# Altium PCB PCB1.PcbDoc
Units mm, origin at the board's own origin, x right, y up, seen from the top; angles counter-clockwise.
Board outline 170 x 40 mm, 2 copper layers (Top Layer, Bottom Layer); 55 components, 44 nets, 202 pads, 0 vias.
Unrouted connection lines stored in the file: 122.
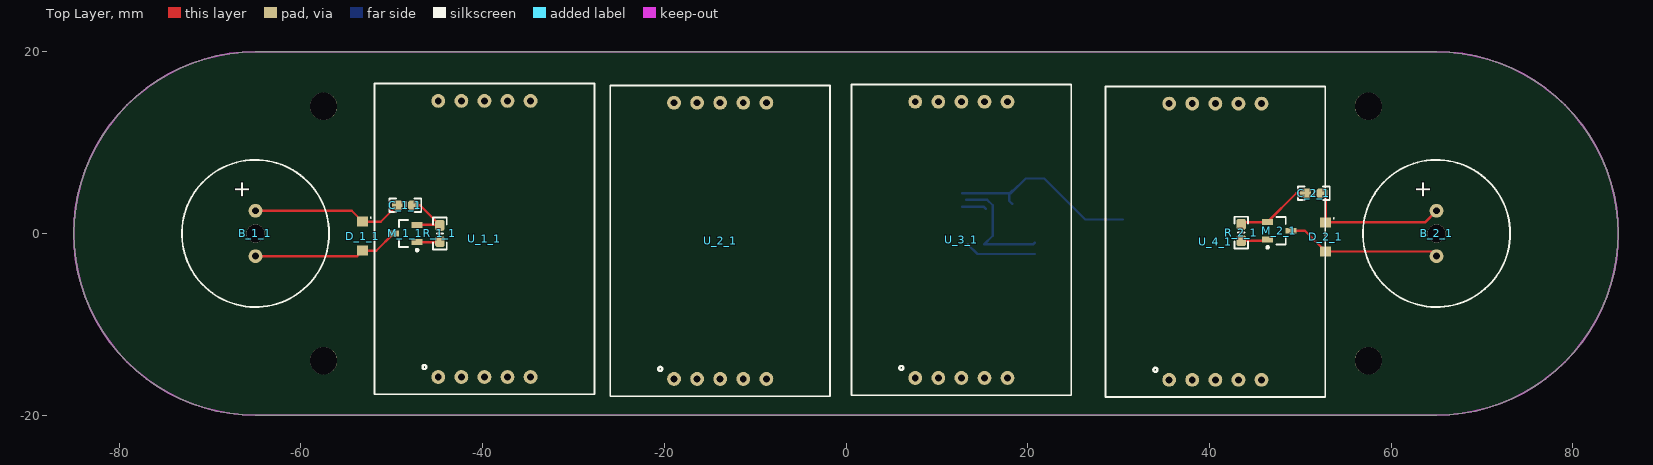
[diagram p0: Top Layer view]
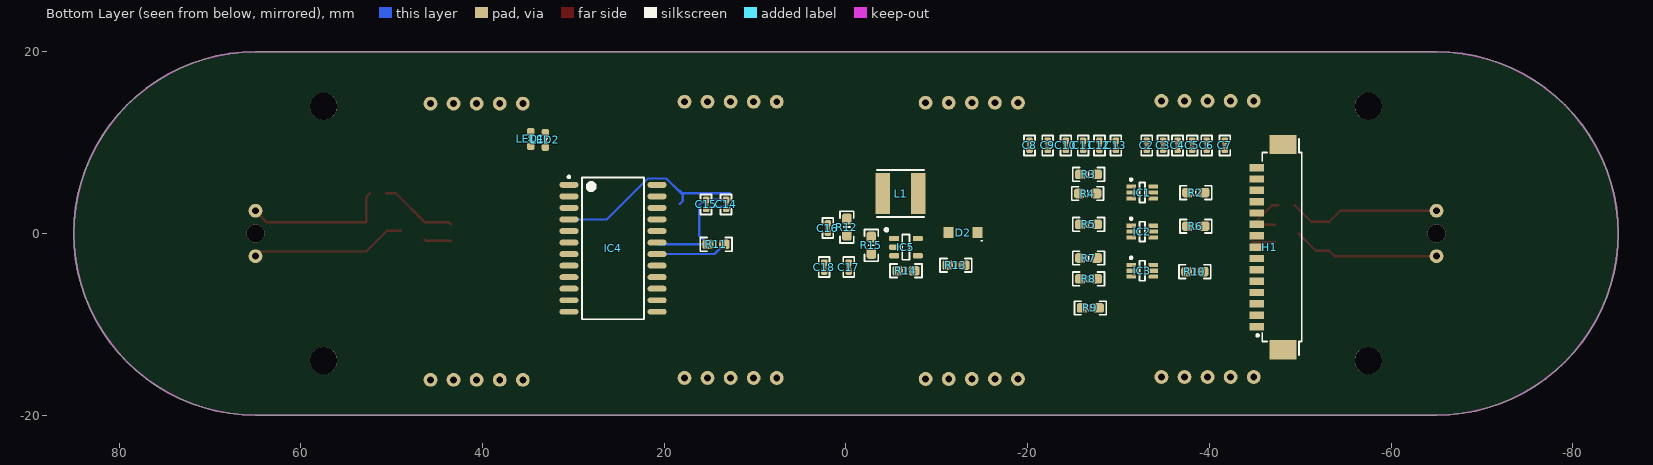
[diagram p1: Bottom Layer view, seen from below]

## Layer stack, top to bottom
Top Solder: solder mask 0.0102, Solder Resist, Dk 3.5
Top Layer: signal copper 0.0356
Dielectric 1: dielectric 0.32, FR-4, Dk 4.8
Bottom Layer: signal copper 0.0356
Bottom Solder: solder mask 0.0102, Solder Resist, Dk 3.5

## Board outline
-65,-20 65,-20 66.427,-19.949 67.846,-19.796 69.251,-19.543 70.635,-19.19 71.989,-18.739 73.308,-18.193 74.585,-17.554 75.813,-16.825 76.986,-16.011 78.097,-15.115 79.142,-14.142 80.115,-13.097 81.011,-11.986 81.825,-10.813 82.554,-9.585 83.193,-8.308 83.739,-6.989 84.19,-5.635 84.543,-4.251 84.796,-2.846 84.949,-1.427 85,0 84.949,1.427 84.796,2.846 84.543,4.251 84.19,5.635 83.739,6.989 83.193,8.308 82.554,9.585 81.825,10.813 81.011,11.986 80.115,13.097 79.142,14.142 78.097,15.115 76.986,16.011 75.813,16.825 74.585,17.554 73.308,18.193 71.989,18.739 70.635,19.19 69.251,19.543 67.846,19.796 66.427,19.949 65,20 -65,20 -66.427,19.949 -67.846,19.796 -69.251,19.543 -70.635,19.19 -71.989,18.739 -73.308,18.193 -74.585,17.554 -75.813,16.825 -76.986,16.011 -78.097,15.115 -79.142,14.142 -80.115,13.097 -81.011,11.986 -81.825,10.813 -82.554,9.585 -83.193,8.308 -83.739,6.989 -84.19,5.635 -84.543,4.251 -84.796,2.846 -84.949,1.427 -85,0 -84.949,-1.427 -84.796,-2.846 -84.543,-4.251 -84.19,-5.635 -83.739,-6.989 -83.193,-8.308 -82.554,-9.585 -81.825,-10.813 -81.011,-11.986 -80.115,-13.097 -79.142,-14.142 -78.097,-15.115 -76.986,-16.011 -75.813,-16.825 -74.585,-17.554 -73.308,-18.193 -71.989,-18.739 -70.635,-19.19 -69.251,-19.543 -67.846,-19.796 -66.427,-19.949

## Design rules (kind name [scope] priority, off if disabled: settings)
Clearance [All] p1: gap=0.254
PolygonConnect [All] p1: connectstyle=Relief reliefconductorwidth=0.254 reliefentries=4 polygonreliefangle="90 Angle" airgapwidth=0.254
RoomDefinition TP_IHM_MAIN [InComponentClass('TP_IHM_MAIN')] p1: confinementstyle=ConfineIn formatcopy=TRUE lockcomponents=FALSE outline 36.4,8 31.5,8 31.5,12.8 36.4,12.8
RoomDefinition U_TP_IHM_CONNECTOR [InComponentClass('U_TP_IHM_CONNECTOR')] p2: confinementstyle=ConfineIn formatcopy=TRUE lockcomponents=FALSE outline -18.8,-14.2 -50.8,-14.2 -50.8,11.2 -18.8,11.2
RoomDefinition U_TP_IHM_DRIVERS [InComponentClass('U_TP_IHM_DRIVERS')] p3: confinementstyle=ConfineIn formatcopy=TRUE lockcomponents=FALSE outline 32.3,-11.2 11.8,-11.2 11.8,7.2 32.3,7.2
RoomDefinition U_TP_IHM_POWER [InComponentClass('U_TP_IHM_POWER')] p4: confinementstyle=ConfineIn formatcopy=TRUE lockcomponents=FALSE outline 4.4,-7.9 -16.4,-7.9 -16.4,8.5 4.4,8.5
RoomDefinition U_TP_IHM_7SEG3 [InComponentClass('U_TP_IHM_7SEG3')] p5: confinementstyle=ConfineIn formatcopy=TRUE lockcomponents=FALSE outline 5.7,-8.7 31.274,-8.7 31.274,16.7 5.7,16.7
RoomDefinition U_TP_IHM_BUZZER2 [InComponentClass('U_TP_IHM_BUZZER2')] p6: confinementstyle=ConfineIn formatcopy=TRUE lockcomponents=FALSE outline 74.36,10.52 42.2,10.52 42.2,-9.7 74.36,-9.7
RoomDefinition U_TP_IHM_BUZZER1 [InComponentClass('U_TP_IHM_BUZZER1')] p7: confinementstyle=ConfineIn formatcopy=TRUE lockcomponents=FALSE outline -74.5,-10.8 -42.9,-10.8 -42.9,10.9 -74.5,10.9
RoomDefinition U_TP_IHM_7SEG4 [InComponentClass('U_TP_IHM_7SEG4')] p8: confinementstyle=ConfineIn formatcopy=TRUE lockcomponents=FALSE outline 28.2,-8.6 53.2,-8.6 53.2,16.8 28.2,16.8
RoomDefinition U_TP_IHM_7SEG2 [InComponentClass('U_TP_IHM_7SEG2')] p9: confinementstyle=ConfineIn formatcopy=TRUE lockcomponents=FALSE outline -26.3,-7.3 -1.2,-7.3 -1.2,16.9 -26.3,16.9
RoomDefinition U_TP_IHM_7SEG1 [InComponentClass('U_TP_IHM_7SEG1')] p10: confinementstyle=ConfineIn formatcopy=TRUE lockcomponents=FALSE outline -52.734,-8.6 -27.8,-8.6 -27.8,16.8 -52.734,16.8
RoutingVias [All] p1: holewidth=0.711 width=1.27 viastyle="Through Hole" minholewidth=0.711 minwidth=1.27 maxholewidth=0.711 maxwidth=1.27
SolderMaskExpansion [All] p1: expansion=0.102
Width [All] p1: maxlimit=0.254 minlimit=0.254 preferedwidth=0.254
29 further rules are at their usual default settings.

## Classes and differential pairs
component class TP_IHM_MAIN: LED1 LED2
component class U_TP_IHM_7SEG1: U_1_1
component class U_TP_IHM_7SEG2: U_2_1
component class U_TP_IHM_7SEG3: U_3_1
component class U_TP_IHM_7SEG4: U_4_1
component class U_TP_IHM_BUZZER1: B_1_1 C_1_1 D_1_1 M_1_1 R_1_1
component class U_TP_IHM_BUZZER2: B_2_1 C_2_1 D_2_1 M_2_1 R_2_1
component class U_TP_IHM_CONNECTOR: C2 C3 C4 C5 C6 C7 C8 C9 C10 C11 C12 C13 H1 IC1 IC2 IC3 R2 R3 R4 R5 R6 R7 R8 R9 R10
component class U_TP_IHM_DRIVERS: C14 C15 IC4 R11
component class U_TP_IHM_POWER: C16 C17 C18 D2 IC5 L1 R12 R13 R14 R15
channel class TP_IHM_7SEG: U_TP_IHM_7SEG1 U_TP_IHM_7SEG2 U_TP_IHM_7SEG3 U_TP_IHM_7SEG4
channel class TP_IHM_BUZZER: U_TP_IHM_BUZZER1 U_TP_IHM_BUZZER2

## Components (designator, comment, footprint, x,y, rotation, side; value= is the part's Value field where it differs from the comment)
B_1_1 "Buzzer" SD160709 -65,0 r90 top (schematic designator B1)
B_2_1 "Buzzer" SD160709 65,0 r90 top (schematic designator B1)
C2 "CerCap" 0402_CAP_LD -33.1,9.7 r270 bottom
C3 "CerCap" 0402_CAP_LD -34.9,9.7 r90 bottom
C4 "CerCap" 0402_CAP_LD -36.5,9.7 r90 bottom
C5 "CerCap" 0402_CAP_LD -38.1,9.7 r90 bottom
C6 "CerCap" 0402_CAP_LD -39.7,9.7 r90 bottom
C7 "CerCap" 0402_CAP_LD -41.7,9.7 r90 bottom
C8 "CerCap" 0402_CAP_LD -20.2,9.7 r90 bottom
C9 "CerCap" 0402_CAP_LD -22.2,9.7 r90 bottom
C10 "CerCap" 0402_CAP_LD -24.2,9.7 r90 bottom
C11 "CerCap" 0402_CAP_LD -26.1,9.7 r90 bottom
C12 "CerCap" 0402_CAP_LD -27.9,9.7 r90 bottom
C13 "CerCap" 0402_CAP_LD -29.7,9.7 r90 bottom
C14 "CerCap" 0402_CAP_LD 13.2,3.2 r90 bottom
C15 "CerCap" 0402_CAP_LD 15.4,3.2 r90 bottom
C16 "CerCap" 0402_CAP_LD 2,0.6 r90 bottom
C17 "CerCap" 0402_CAP_LD -0.3,-3.7 r270 bottom
C18 "CerCap" 0402_CAP_LD 2.4,-3.7 r270 bottom
C_1_1 "CerCap" 0603_CAP_LD -48.5,3.1 r180 top (schematic designator C1)
C_2_1 "CerCap" 0603_CAP_LD 51.5,4.42 r0 top (schematic designator C1)
D2 "PMEG3010ER" SOD123W -12.9,0.1 r0 bottom
D_1_1 "PMEG3010ER" SOD123W -53.2,-0.3 r270 top (schematic designator D1)
D_2_1 "PMEG3010ER" SOD123W 52.8,-0.38 r270 top (schematic designator D1)
H1 "Header" 653115131822 -48,-1.5 r90 bottom
IC1 "SN74LVC1T45" MO-203AB_LD -32.6,4.5 r180 bottom
IC2 "SN74LVC1T45" MO-203AB_LD -32.6,0.2 r180 bottom
IC3 "SN74LVC1T45" MO-203AB_LD -32.6,-4.1 r180 bottom
IC4 "8 Digits Driver" MAX7221CWG 25.646,-1.633 r180 bottom
IC5 "Step up Regulator" LMR62421 -6.6,-1.5 r180 bottom
L1 "10uH, 1.6A" INDUCTOR_WE-LQS_5020 -6,4.4 r180 bottom
LED1 "RED Led" LED_0603_RED 34.7,10.4 r90 bottom
LED2 "RED Led" LED_0603_RED 33.1,10.3 r90 bottom
M_1_1 "NMOS" MOSFET-SOT23#1 -48.5,0 r180 top (schematic designator M1)
M_2_1 "NMOS" MOSFET-SOT23#2 47.7,0.3 r0 top (schematic designator M1)
R2 "Resistor" 0603_RES_LD -38.5,4.5 r180 bottom
R3 "Resistor" 0603_RES_LD -26.7,6.5 r180 bottom
R4 "Resistor" 0603_RES_LD -26.6,4.4 r180 bottom
R5 "Resistor" 0603_RES_LD -26.7,1 r180 bottom
R6 "Resistor" 0603_RES_LD -38.5,0.8 r180 bottom
R7 "Resistor" 0603_RES_LD -26.7,-2.7 r180 bottom
R8 "Resistor" 0603_RES_LD -26.7,-5 r180 bottom
R9 "Resistor" 0603_RES_LD -26.9,-8.2 r180 bottom
R10 "Resistor" 0603_RES_LD -38.4,-4.2 r0 bottom
R11 "Resistor" 0603_RES_LD 14.3,-1.2 r0 bottom
R12 "Resistor" 0603_RES_LD -0.1,0.7 r270 bottom
R13 "Resistor" 0603_RES_LD -12.1,-3.5 r180 bottom
R14 "Resistor" 0603_RES_LD -6.6,-4.1 r180 bottom
R15 "Resistor" 0603_RES_LD -2.8,-1.3 r270 bottom
R_1_1 "Resistor" 0603_RES_LD -44.7,0 r270 top (schematic designator R1)
R_2_1 "Resistor" 0603_RES_LD 43.5,0.1 r270 top (schematic designator R1)
U_1_1 "7 Segments" SA10-21GWA -39.8,-0.6 r0 top (schematic designator U1)
U_2_1 "7 Segments" SA10-21GWA -13.846,-0.808 r0 top (schematic designator U1)
U_3_1 "7 Segments" SA10-21GWA 12.7,-0.7 r0 top (schematic designator U1)
U_4_1 "7 Segments" SA10-21GWA 40.654,-0.908 r0 top (schematic designator U1)

## Footprints (in the part's own frame and the unit in brackets; to place one, negate y for a bottom-side part, rotate by r counter-clockwise, add the part's x,y. Pads: shape width x height; smd on the part's side, far side on the other; paste and mask are expansions set on the pad)
0402_CAP_LD [mm] "0402 Capacitor low Density"
  rrect50% 0.72x0.72 smd: 1(-0.5,0) 2(0.5,0)
  silkscreen extent -1.1,-0.6 1.1,0.6, body extent -0.52,-0.27 0.53,0.28, height 0.55
0603_CAP_LD [mm] "0603 Capacitor Low Density"
  rrect50% 1.2x1.05 smd: 1(-0.9,0) 2(0.9,0)
  silkscreen extent -1.75,-0.75 1.75,0.75, body extent -0.85,-0.45 0.85,0.45, height 0.55
0603_RES_LD [mm] "0603 Resistor Low Density"
  rrect50% 1.2x1.05 smd: 1(-0.9,0) 2(0.9,0)
  silkscreen extent -1.75,-0.75 1.75,0.75, body extent -0.85,-0.45 0.85,0.45, height 0.55
653115131822 [mm] "1.25mm SMT Male Horizontal Shrouded Header, 15p"
  rect 0.81x1.6 smd: 1(-8.75,2.8) 2(-7.5,2.8) 3(-6.25,2.8) 4(-5,2.8) 5(-3.75,2.8) 6(-2.5,2.8) 7(-1.25,2.8) 8(0,2.8) 9(1.25,2.8) 10(2.5,2.8) 11(3.75,2.8) 12(5,2.8) 13(6.25,2.8) 14(7.5,2.8) 15(8.75,2.8)
  rect 2.1x3 smd: ""(-11.3,-0.1) ""(11.3,-0.1)
  silkscreen extent -11.9,-2.17 11.9,2.82, body extent -11.75,-2.1 11.75,3.3, height 3.4
INDUCTOR_WE-LQS_5020 [mm] "SMD Power Inductor, 2-Leads, body 5x5mm"
  rect 1.6x4.5 smd: 1(-1.95,0) 2(1.95,0)
  silkscreen extent -2.6,-2.6 2.6,2.6, body extent -2.5,-2.5 2.5,2.5, height 2
LED_0603_RED [mm] "SMD LED 0603"
  rrect50% 0.8x0.8 smd: 1(-0.8,0) 2(0.8,0)
  silkscreen extent -0.23,-0.3 0.25,0.3, body extent -0.8,-0.4 0.8,0.4, height 0.59
LMR62421 [mm] "LMR62421 Texas SOT-23"
  rrect50% 1.1x0.6 smd: 1(-1.3,0.95) 2(-1.3,0) 3(-1.3,-0.95) 4(1.3,-0.95) 5(1.3,0.95)
  silkscreen extent -2.34,-1.4 0.4,2.08, body extent -1.42,-1.5 1.42,1.5, height 1.2
MAX7221CWG [mm] "MAX7221CWG SOIC 24"
  oval 2.1x0.65 smd: 1(-4.85,6.985) 2(-4.85,5.715) 3(-4.85,4.445) 4(-4.85,3.175) 5(-4.85,1.905) 6(-4.85,0.635) 7(-4.85,-0.635) 8(-4.85,-1.905) 9(-4.85,-3.175) 10(-4.85,-4.445) 11(-4.85,-5.715) 12(-4.85,-6.985) 13(4.85,-6.985) 14(4.85,-5.715) 15(4.85,-4.445) 16(4.85,-3.175) 17(4.85,-1.905) 18(4.85,-0.635) 19(4.85,0.635) 20(4.85,1.905) 21(4.85,3.175) 22(4.85,4.445) 23(4.85,5.715) 24(4.85,6.985)
  silkscreen extent -4.98,-7.8 3.4,7.98, body extent -5.16,-7.8 5.16,7.8, height 2.65
MO-203AB_LD [mm] "MO-203AB Low Density SOT23 6 Leads"
  rect 1.05x0.45 smd: 1(-1.225,0.65) 2(-1.225,0) 3(-1.225,-0.65) 4(1.225,-0.65) 5(1.225,0) 6(1.225,0.65)
  silkscreen extent -1.35,-1.1 0.3,1.55, body extent -1.2,-1.08 1.2,1.07, height 1.1
MOSFET-SOT23#1 [mm] "MOSFET SOT23 Package"
  rect 1.2x0.65 smd: D(1.3,0) G(-1.3,0.95) S(-1.3,-0.95)
  silkscreen extent -1.43,-1.5 0.7,1.95, body extent -1.42,-1.5 1.42,1.5, height 1.2
MOSFET-SOT23#2 [mm] "MOSFET SOT23 Package"
  rect 1.2x0.65 smd: D(1.3,0) G(-1.3,-0.95) S(-1.3,0.95)
  silkscreen extent -1.42,-1.95 0.7,1.5, body extent -1.42,-1.5 1.42,1.5, height 1.2
SA10-21GWA [mil] "KingBright 7 Segment SA10-21GWA"
  round 60 hole 30: 1(-200,-598.43) 2(-100,-598.43) 3(0,-598.43) 4(100,-598.43) 5(200,-598.43) 6(200,598.43) 7(100,598.43) 8(0,598.43) 9(-100,598.43) 10(-200,598.43)
  silkscreen extent -476,-673 476,673, body extent -472,-669 472,669, height 414
SD160709 [mil] "TDK SD160709 Buzzer"
  round 60 hole 30: +(98.43,0) -(-98.43,0)
  silkscreen extent -319,-319 319,319, body extent -315,-315 315,315, height 278
SOD123W [mm] "SOD123W Nexperia Low density"
  rect 1.1x1.2 smd: A(1.6,0) K(-1.6,0)
  silkscreen extent -2.1,0.85 -2,0.95, body extent -1.75,-0.95 1.75,0.95, height 1.1

## Part data
B_1_1 B_2_1: library part SD160709, "TDK SD160709 Buzzer"
C2 C3 C4 C5 C6 C7 C8 C9 C10 C11 C12 C13 C14 C15 C16 C17 C18 C_1_1 C_2_1: "Ceramic Capacitor"
D2 D_1_1 D_2_1: library part Schottky_PMEG3010ER, "Nexperia 1A low Vf Mega Schottky barrier rectifier"
H1: library part HEADER_15x1, "Header 15x1"
IC1 IC2 IC3: "Single Bit Dual Supply Buffer"
IC4: library part MAX7221, "MAX7221 8 Digit 7 Segments Display"
IC5: library part LMR62421XMF, "LMR62421 simple switcher 24 Vout stepup voltage SOT-23"
L1: library part INDUCTOR_74404052100, "WE-LQS SMD Power Inductor, size 5020, 10uH, 1.6A"
LED1 LED2: library part LED_RED_SMD_WE_150060RS750x0, "LED RED SMD WE 150060RS750x0"
M_1_1 M_2_1: library part N-MOSFET, "N MOSFET"
U_1_1 U_2_1 U_3_1 U_4_1: library part SC10-21SRWA, "KingBright Led 7 Segments"

## Free pads (board coordinates)
  round 2 hole 2 unplated: 1(-65,0) 1(65,0)
  round 3 hole 3 unplated: 1(-57.5,-14) 1(-57.5,14) 1(57.5,-14) 1(57.5,14)

## Nets (pads, with @x,y where several pads share a name; then routed paths per layer and width w, separated by ;. In a path a pad name is that pad's centre, name@x,y a point inside that pad or via, vN(x,y) a via of type N, cw(c..) or ccw(c..) an arc to the next point about the centre after c; other vN are vias at no path point)
5V: C8.2 C9.2 C10.2 C11.2 C12.2 C13.2 C14.2 C15.2 C17.2 C18.2 D2.K IC1.6 IC2.6 IC3.6 IC4.19 R11.2 R13.2 | length 13.6
  Bottom Layer w0.254: C14.2 C15.2 15.553,3.7 16.141,3.112 16.141,-0.259 R11.2 20.594,-1.2 IC4.19
DIG0: U_4_1.3 U_4_1.8
DIG1: U_3_1.3 U_3_1.8
DIG2: U_2_1.3 U_2_1.8
DIG3: U_1_1.3 U_1_1.8
"DIG 0": IC4.2
"DIG 1": IC4.3 LED2.1
"DIG 2": IC4.5
"DIG 3": IC4.6
GND: C2.1 C3.1 C4.1 C5.1 C6.1 C7.1 C8.1 C9.1 C10.1 C11.1 C12.1 C13.1 C14.1 C15.1 C16.1 C18.1 C_1_1.1 C_2_1.1 H1.5 H1.7 H1.9 H1.10 H1.11 H1.13 H1.15 IC1.2 IC2.2 IC3.2 IC4.4 IC4.9 IC5.2 M_1_1.S M_2_1.S R14.1 R15.1 R_1_1.1 R_2_1.1 | length 39.4
  Top Layer w0.254: C_1_1.1 -46.9,3.1 -44.75,0.95 M_1_1.S ; R_2_1.1 43.75,1.25 M_2_1.S 49.57,4.42 C_2_1.1
  Bottom Layer w0.254: 12.788,2.959 15.141,2.959 C15.1 ; 12.788,4.441 18.162,4.441 19.779,6.058 21.813,6.058 26.329,1.542 IC4.4 ; 18.288,3.259 17.959,3.588 17.959,4.412 18.288,4.741
NetB_1_1_-: B_1_1.- D_1_1.A M_1_1.D | length 16.2
  Top Layer w0.254: B_1_1.- -53.8,-2.5 D_1_1.A -51.7,-1.9 M_1_1.D
NetB_2_1_-: B_2_1.- D_2_1.A M_2_1.D | length 17.2
  Top Layer w0.254: M_2_1.D 50.52,0.3 D_2_1.A 64.48,-1.98 B_2_1.-
NetC17_1: C17.1 IC5.3 R13.1 R15.2
NetD2_A: D2.A IC5.1 L1.2
NetH1_3: H1.3 R3.1
NetH1_4: H1.4 R4.1
NetH1_6: H1.6 R5.1
NetH1_8: H1.8 R7.1
NetH1_12: H1.12 R8.1
NetH1_14: H1.14 R9.1
NetIC1_3: IC1.3 R4.2
NetIC1_4: IC1.4 R2.1
NetIC2_3: IC2.3 R5.2
NetIC2_4: IC2.4 R6.1
NetIC3_3: IC3.3 R7.2
NetIC3_4: IC3.4 R10.1
NetIC4_18: IC4.18 R11.1 | length 7.8
  Bottom Layer w0.254: R11.1 14.468,-2.268 IC4.18
NetIC5_5: IC5.5 R12.2
NetLED1_1: LED1.1 LED2.2
PWM_LEFT: M_1_1.G R9.2 R_1_1.2 | length 2.5
  Top Layer w0.254: M_1_1.G -44.75,-0.95 R_1_1.2
PWM_RIGHT: M_2_1.G R8.2 R_2_1.2 | length 3
  Top Layer w0.254: R_2_1.2 46.25,-0.8 M_2_1.G
PWR_EN: IC5.4 R3.2 R14.2
"SEG A": IC4.14 U_1_1.7 U_2_1.7 U_3_1.7 U_4_1.7
"SEG B": IC4.15 U_1_1.6 U_2_1.6 U_3_1.6 U_4_1.6
"SEG C": IC4.16 U_1_1.4 U_2_1.4 U_3_1.4 U_4_1.4
"SEG D": IC4.17 U_1_1.2 U_2_1.2 U_3_1.2 U_4_1.2
"SEG DP": IC4.23 LED1.2
"SEG E": IC4.20 U_1_1.1 U_2_1.1 U_3_1.1 U_4_1.1
"SEG F": IC4.21 U_1_1.9 U_2_1.9 U_3_1.9 U_4_1.9
"SEG G": IC4.22 U_1_1.10 U_2_1.10 U_3_1.10 U_4_1.10
SPI_CLK: IC4.13 R6.2
SPI_CS: IC4.12 R2.2
SPI_MOSI: IC4.1 R10.2
VBAT: B_1_1.+ B_2_1.+ C2.2 C3.2 C4.2 C5.2 C6.2 C7.2 C16.2 C_1_1.2 C_2_1.2 D_1_1.K D_2_1.K H1.1 H1.2 IC1.1 IC1.5 IC2.1 IC2.5 IC3.1 IC3.5 L1.1 R12.1 | length 32.9
  Top Layer w0.254: B_1_1.+ -54.4,2.5 D_1_1.K -51.2,1.3 C_1_1.2 ; C_2_1.2 52.8,4.02 D_2_1.K 63.72,1.22 B_2_1.+
pads on no net: H1. IC4.7 IC4.8 IC4.10 IC4.11 IC4.24 U_1_1.5 U_2_1.5 U_3_1.5 U_4_1.5

## Keep-outs
Keep-Out Layer:
  the board outline again, w0.2

## Silkscreen, mask and mechanical layers (free items; w line width, h text height)
Mechanical 1:
  the board outline again, w0.2

## Text inside footprints (layer, text, board x,y; h text height)
B_1_1: Top Overlay "+" at -65.1,3.8 h3 r90
B_2_1: Top Overlay "+" at 64.9,3.8 h3 r90